# Altium PCB rauch.PcbDoc
Units mm, origin at the board's own origin, x right, y up, seen from the top; angles counter-clockwise.
Board outline 50 x 25 mm, 2 copper layers (Top Layer, Bottom Layer); 27 components, 17 nets, 61 pads, 10 vias.
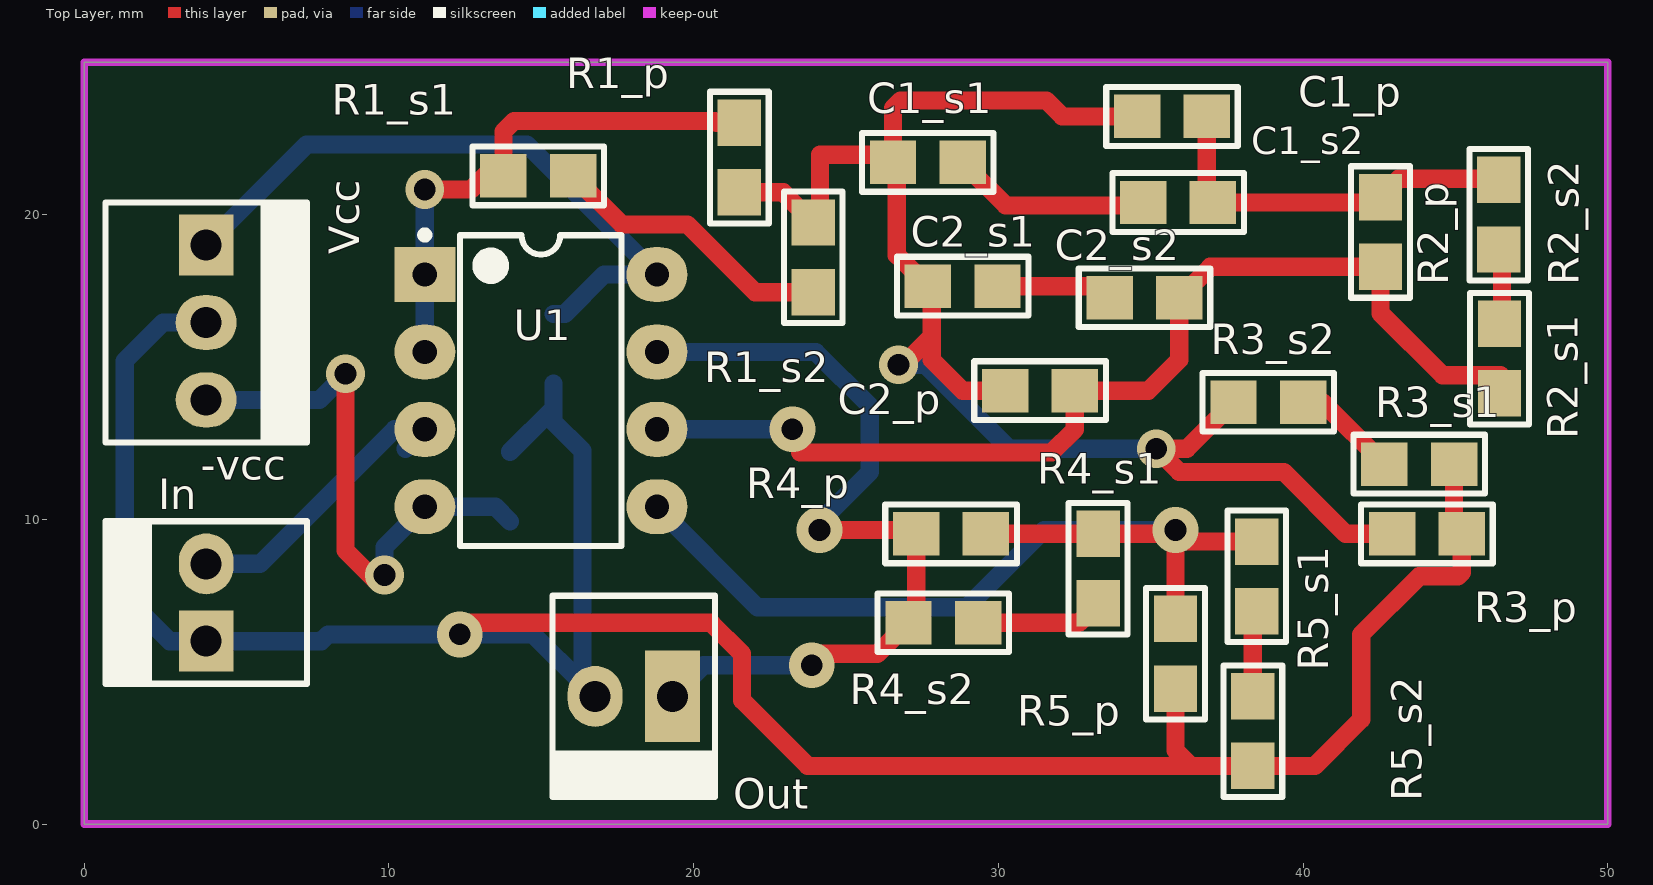
[diagram p0: Top Layer view]
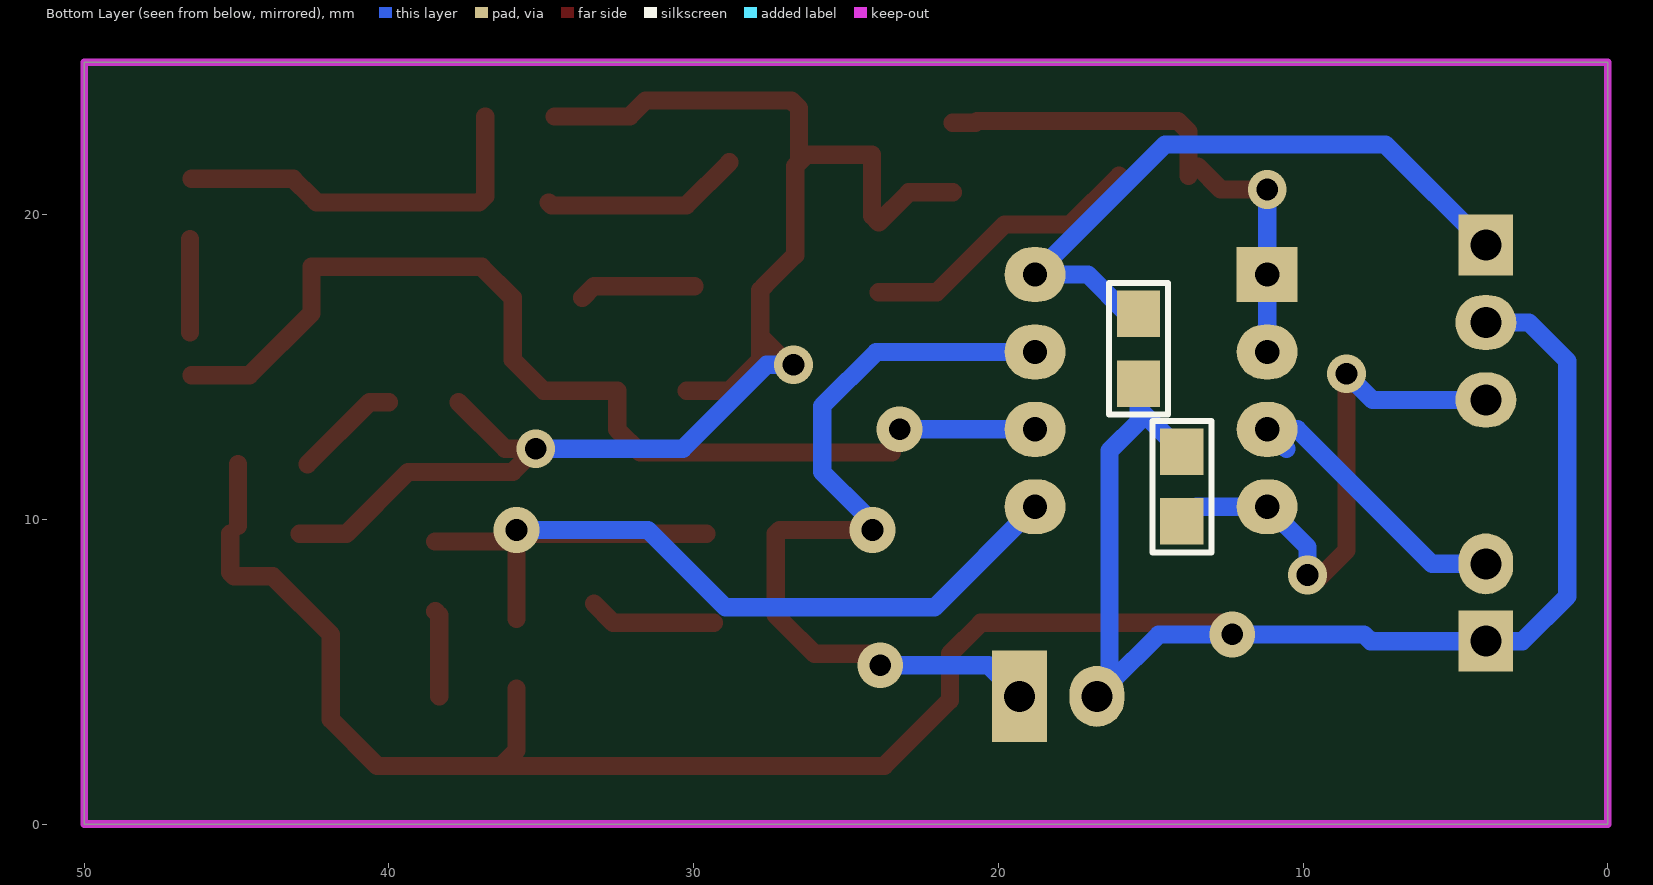
[diagram p1: Bottom Layer view, seen from below]
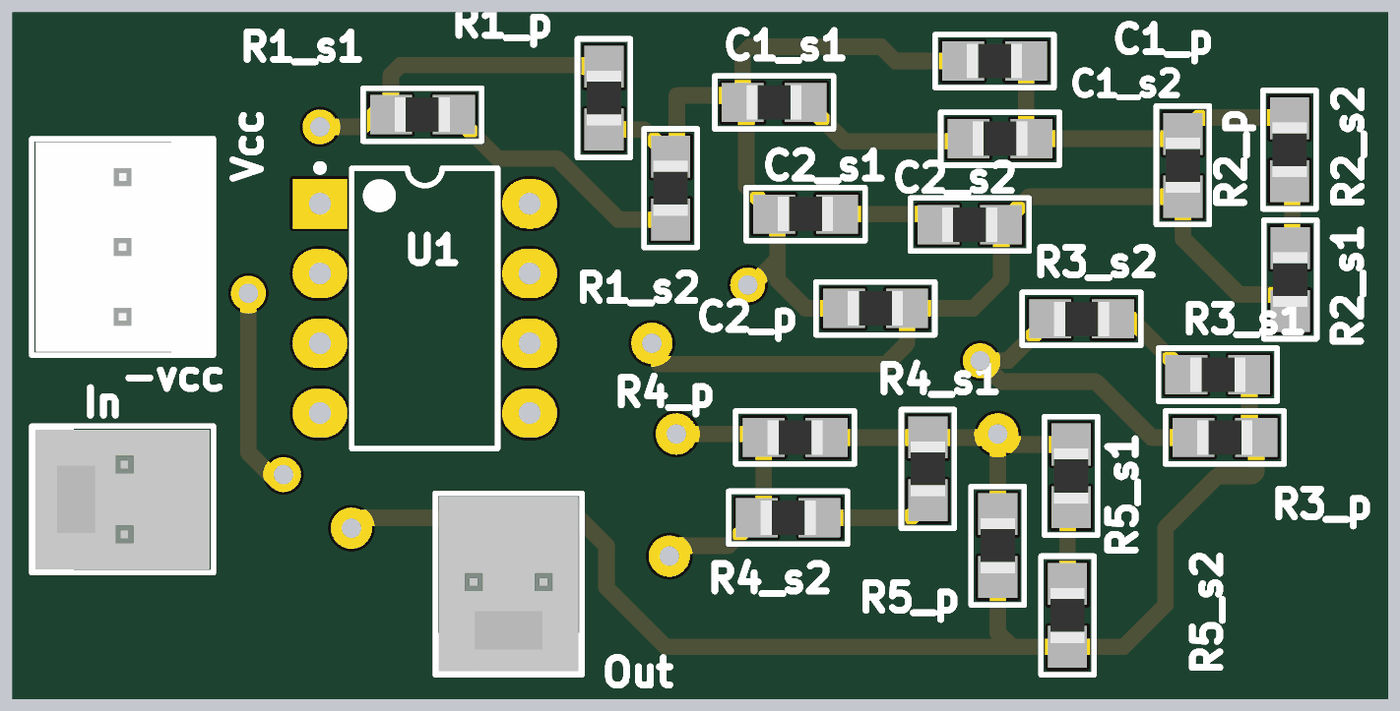
[diagram p2: 3D render of the assembled board from above, using the file's embedded part models]

## Layer stack, top to bottom
Top Solder: solder mask 0.0102, Solder Resist, Dk 3.5
Top Layer: signal copper 0.0356
Dielectric 1: dielectric 0.32, FR-4, Dk 4.8
Bottom Layer: signal copper 0.0356
Bottom Solder: solder mask 0.0102, Solder Resist, Dk 3.5

## Board outline
0,0 0,25 50,25 50,0

## Design rules (kind name [scope] priority, off if disabled: settings)
Clearance [All] p1: gap=0.254
PolygonConnect [All] p1: connectstyle=Relief reliefconductorwidth=0.254 reliefentries=4 polygonreliefangle="90 Angle" airgapwidth=0.254
RoutingVias [All] p1: holewidth=0.711 width=1.27 viastyle="Through Hole" minholewidth=0.711 minwidth=1.27 maxholewidth=0.711 maxwidth=1.27
SolderMaskExpansion [All] p1: expansion=0.102
Width [All] p1: maxlimit=0.6 minlimit=0.6 preferedwidth=0.6
30 further rules are at their usual default settings.

## Classes and differential pairs
component class Rauch: C1_p C1_s1 C1_s2 C2_p C2_s1 C2_s2 In Out R1_p R1_s1 R1_s2 R2_p R2_s1 R2_s2 R3_p R3_s1 R3_s2 R4_p R4_s1 R4_s2 R5_p R5_s1 R5_s2 U1 Vcc

## Components (designator, comment, footprint, x,y, rotation, side; value= is the part's Value field where it differs from the comment)
C1_p "CAP" 0805 35.7,23.225 r0 top
C1_s1 "CAP" 0805 27.686,21.717 r0 top
C1_s2 "CAP" 0805 35.9,20.4 r0 top
C2_p "CAP" 0805 31.369,14.224 r0 top
C2_s1 "CAP" 0805 28.829,17.653 r0 top
C2_s2 "CAP" 0805 34.798,17.272 r0 top
CD1 "CAP" 0805 15.4,15.6 r270 bottom
CD2 "CAP" 0805 13.975,11.075 r270 bottom
In "MOLEX2" MOLEX2#1 4,6 r90 top
Out "MOLEX2" MOLEX2#2 19.304,4.191 r180 top
R1_p "RES" 0805 21.5,21.875 r270 top
R1_s1 "RES" 0805 14.9,21.275 r0 top
R1_s2 "RES" 0805 23.925,18.6 r90 top
R2_p "RES" 0805 42.545,19.431 r90 top
R2_s1 "RES" 0805 46.45,15.275 r90 top
R2_s2 "RES" 0805 46.425,20 r90 top
R3_p "RES" 0805 44.069,9.525 r180 top
R3_s1 "RES" 0805 43.815,11.811 r180 top
R3_s2 "RES" 0805 38.862,13.843 r180 top
R4_p "RES" 0805 28.448,9.525 r180 top
R4_s1 "RES" 0805 33.274,8.382 r270 top
R4_s2 "RES" 0805 28.194,6.604 r180 top
R5_p "RES" 0805 35.814,5.588 r90 top
R5_s1 "RES" 0805 38.481,8.128 r90 top
R5_s2 "RES" 0805 38.354,3.048 r90 top
U1 "TL082ACP" TI-P8 14.986,14.224 r0 top
Vcc "MOLEX3" MOLEX3 4,19 r270 top

## Footprints (in the part's own frame and the unit in brackets; to place one, negate y for a bottom-side part, rotate by r counter-clockwise, add the part's x,y. Pads: shape width x height; smd on the part's side, far side on the other; paste and mask are expansions set on the pad)
0805 [mil] "Pasivo 0805"
  rect 60x56 smd: 1(-45,0) 2(45,0)
  silkscreen extent -85,-38 85,38, body extent -40,-24 39,25, height 15
MOLEX2#1 [mm]
  rect 2x1.8 hole 1.016: 1(0,0)
  oval 2x1.8 hole 1.016: 2(2.54,0)
  silkscreen extent -1.4,-3.3 3.94,3.3, body extent -1.27,-3.17 3.81,3.18, height 10.74
MOLEX2#2 [mm]
  rect 1.8x3 hole 1.016: 1(0,0)
  oval 1.8x2 hole 1.016: 2(2.54,0)
  silkscreen extent -1.4,-3.3 3.94,3.3, body extent -1.27,-3.17 3.81,3.18, height 10.74
MOLEX3 [mm]
  rect 2x1.8 hole 1.016: 1(0,0)
  oval 1.8x2 hole 1.016: 2(2.54,0) 3(5.08,0)
  silkscreen extent -1.4,-3.3 6.48,3.3, body extent -1.27,-3.18 6.35,3.18, height 10.74
TI-P8 [mm] "DIP, 8-Leads, Body 9.59x6.35mm, Pitch 2.54mm"
  rect 2x1.8 hole 0.8: 1(-3.81,3.81)
  oval 2x1.8 hole 0.8: 2(-3.81,1.27) 3(-3.81,-1.27) 4(-3.81,-3.81) 5(3.81,-3.81) 6(3.81,-1.27) 7(3.81,1.27) 8(3.81,3.81)
  silkscreen extent -3.93,-5.1 2.65,5.23, body extent -3.95,-5.07 3.95,5.07, height 5.08

## Part data
U1: "JFET-Input Operational Amplifier, 7 to 36 V, 0 to 70 degC, 8-pin DIP (P8), Pb-Free (RoHS)"

## Via types
v1: diameter 1.27, hole 0.711, Top Layer to Bottom Layer, 5 vias
v2: diameter 1.5, hole 0.711, Top Layer to Bottom Layer, 5 vias

## Nets (pads, with @x,y where several pads share a name; then routed paths per layer and width w, separated by ;. In a path a pad name is that pad's centre, name@x,y a point inside that pad or via, vN(x,y) a via of type N, cw(c..) or ccw(c..) an arc to the next point about the centre after c; other vN are vias at no path point)
-VCC: CD2.2 U1.4 Vcc.3 | length 18
  Top Layer w0.6: v1(8.575,14.775) 8.575,8.975 v1@9.6,7.95
  Bottom Layer w0.6: Vcc.3 7.72,13.92 v1(8.575,14.775) ; v1(9.85,8.175) 9.85,9.088 U1.4 13.493,10.414 CD2.2
GND: CD1.2 CD2.1 In.1 Out.2 R3_p.1 R3_s1.1 R5_p.1 R5_s2.1 Vcc.2 | length 86.4
  Top Layer w0.6: v2(12.319,6.223) 12.7,6.604 20.574,6.604 21.59,5.588 21.59,4.064 23.749,1.905 36.322,1.905 ; R5_p.1 35.814,2.413 36.322,1.905 ; R3_p.1@44.958,9.779 R3_s1.1 ; R3_p.1 45.212,8.255 45.085,8.128 43.815,8.128 41.91,6.223 41.91,3.429 40.386,1.905 R5_s2.1 36.322,1.905
  Bottom Layer w0.6: Vcc.2 2.585,16.46 1.325,15.2 1.325,7.475 2.8,6 In.1 7.777,6 8,6.223 v2(12.319,6.223) 14.732,6.223 Out.2@16.35,4.605 ; CD2.1 15.4,13.643 ; CD1.2 15.4,13.643 ; Out.2 Out.2@16.35,4.605 ; 15.4,13.643 15.4,13.2 16.35,12.25 Out.2@16.35,4.605
NetC1_p_1: C1_p.1 C1_s1.1 C2_p.1 C2_s1.1 R1_p.2 R1_s2.2 R3_p.2 R3_s2.2 | length 50.7
  Top Layer w0.6: R1_p.2 22.936,20.732 R1_s2.2 24.15,19.968 24.15,21.971 26.289,21.971 C1_s1.1 ; v1(26.725,15.075) 26.888,15.075 27.813,16 ; C2_p.1 28.829,14.224 27.813,15.24 27.813,16 ; C1_p.1 32.1,23.225 31.575,23.75 26.798,23.75 26.543,23.495 C1_s1.1 ; R3_s2.2 36.195,12.319 v1(35.179,12.319) 35.941,11.557 39.37,11.557 41.402,9.525 R3_p.2 ; C1_s1.1 26.67,21.59 26.67,18.669 C2_s1.1 27.813,17.526 27.813,16
  Bottom Layer w0.6: v1(26.725,15.075) 27.597,15.075 30.353,12.319 v1(35.179,12.319)
NetC1_p_2: C1_p.2 C1_s2.2 R2_p.2 R2_s2.2 | length 12.7
  Top Layer w0.6: C1_p.2 36.843,20.6 C1_s2.2 42.371,20.4 R2_p.2 43.146,21.175 R2_s2.2@46.482,21.175
NetC1_s1_2: C1_s1.2 C1_s2.1 | length 6.6
  Top Layer w0.6: C1_s1.2 30.246,20.3 34.657,20.3 C1_s2.1
NetC2_p_2: C2_p.2 C2_s2.2 R2_p.1 R2_s1.1 U1.6 | length 35.1
  Top Layer w0.6: v2(23.241,12.954) 23.495,12.7 23.495,12.192 31.75,12.192 32.512,12.954 C2_p.2 34.925,14.224 35.941,15.24 C2_s2.2 36.957,18.288 R2_p.1 42.545,16.764 44.577,14.732 R2_s1.1@46.482,14.732
  Bottom Layer w0.6: U1.6 v2(23.241,12.954)
NetC2_s1_2: C2_s1.2 C2_s2.1 | length 3.8
  Top Layer w0.6: C2_s1.2 33.274,17.653 C2_s2.1
NetIn_2: In.2 U1.3 | length 9.9
  Bottom Layer w0.6: In.2 5.765,8.54 10.179,12.954 U1.3 U1.3@10.541,12.319
NetOut_1: Out.1 R4_p.2 R4_s2.2 U1.7 | length 26.9
  Top Layer w0.6: v2(23.876,5.207) 24.257,5.588 26.035,5.588 R4_s2.2 27.305,6.858 R4_p.2 27.178,9.652 v2(24.13,9.652)
  Bottom Layer w0.6: U1.7 24.003,15.494 25.781,13.716 25.781,11.557 v2@24.384,10.16 ; Out.1 20.32,5.207 v2(23.876,5.207)
NetR1_p_1: R1_p.1 R1_s1.1 U1.1 U1.2 | length 17.5
  Top Layer w0.6: v1(11.176,20.828) 12.7,20.828 R1_s1.1@13.452,21.58 ; R1_s1.1 13.757,22.732 14.1,23.075 20.7,23.075 20.757,23.018 R1_p.1
  Bottom Layer w0.6: v1@11.049,20.955 v1(11.176,20.828) U1.1 U1.2
NetR1_s1_2: R1_s1.2 R1_s2.1 | length 9.5
  Top Layer w0.6: R1_s1.2 17.643,19.675 19.8,19.675 22.018,17.457 R1_s2.1
NetR2_s1_2: R2_s1.2 R2_s2.1 | length 3
  Top Layer w0.6: R2_s1.2@46.532,16.143 R2_s2.1@46.532,19.191
NetR3_s1_2: R3_s1.2 R3_s2.1 | length 3.5
  Top Layer w0.6: R3_s2.1 40.64,13.843 R3_s1.2
NetR4_p_1: R4_p.1 R4_s1.1 R5_p.2 R5_s1.2 U1.5 | length 31.5
  Top Layer w0.6: R4_p.1 R4_s1.1 35.687,9.525 v2(35.814,9.652) ; R5_p.2 v2(35.814,9.652) ; R5_s1.2 36.195,9.271 v2(35.814,9.652)
  Bottom Layer w0.6: U1.5 22.098,7.112 28.956,7.112 31.496,9.652 v2(35.814,9.652)
NetR4_s1_2: R4_s1.2 R4_s2.1 | length 4.2
  Top Layer w0.6: R4_s2.1 32.639,6.604 R4_s1.2
NetR5_s1_1: R5_s1.1 R5_s2.2 | length 2.8
  Top Layer w0.6: R5_s2.2 38.354,6.858 R5_s1.1
VCC: CD1.1 U1.8 Vcc.1 | length 21.9
  Bottom Layer w0.6: Vcc.1 7.3,22.3 14.53,22.3 U1.8 17.059,18.034 15.768,16.743 CD1.1

## Keep-outs
Keep-Out Layer:
  lines w0.254: 50,25 0,25 0,0 50,0 50,25 ; 50,25 50,25

## Silkscreen, mask and mechanical layers (free items; w line width, h text height)
Top Overlay:
  text "-vcc" at 3.825,11.3 h1